# EAGLE board BareBonesArduino (EAGLE 7.5.0)
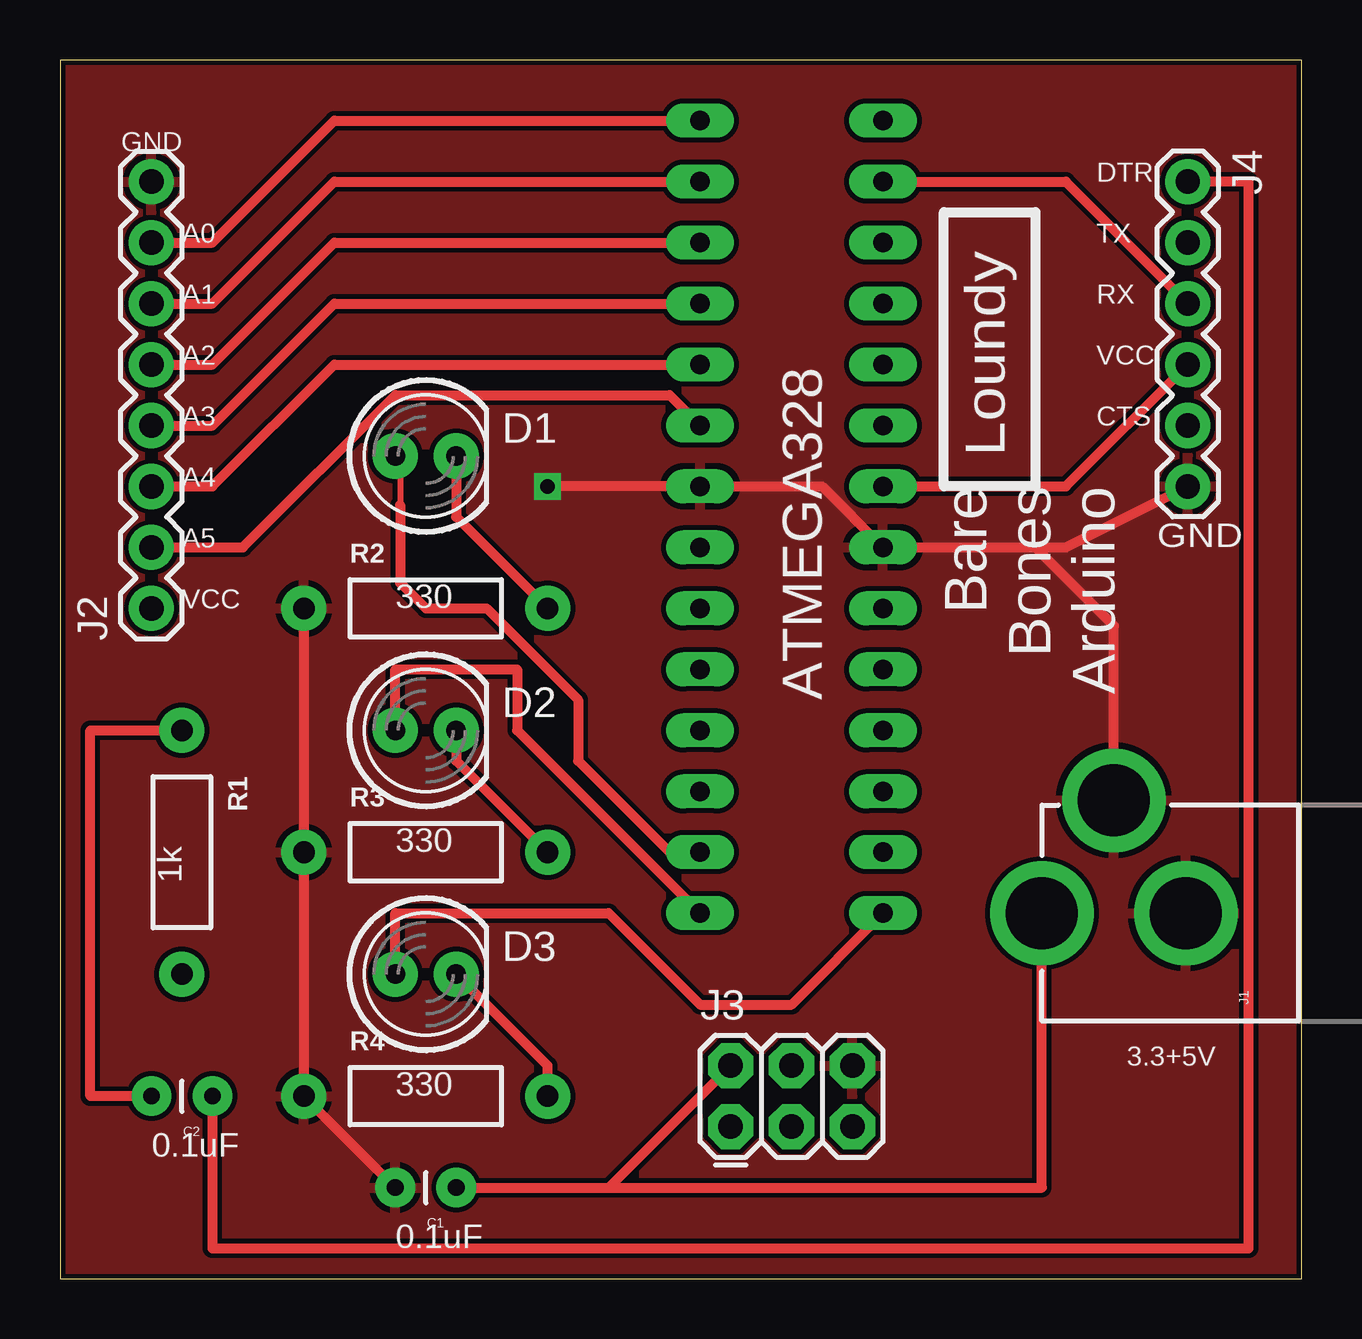
[diagram p0: board, top side]
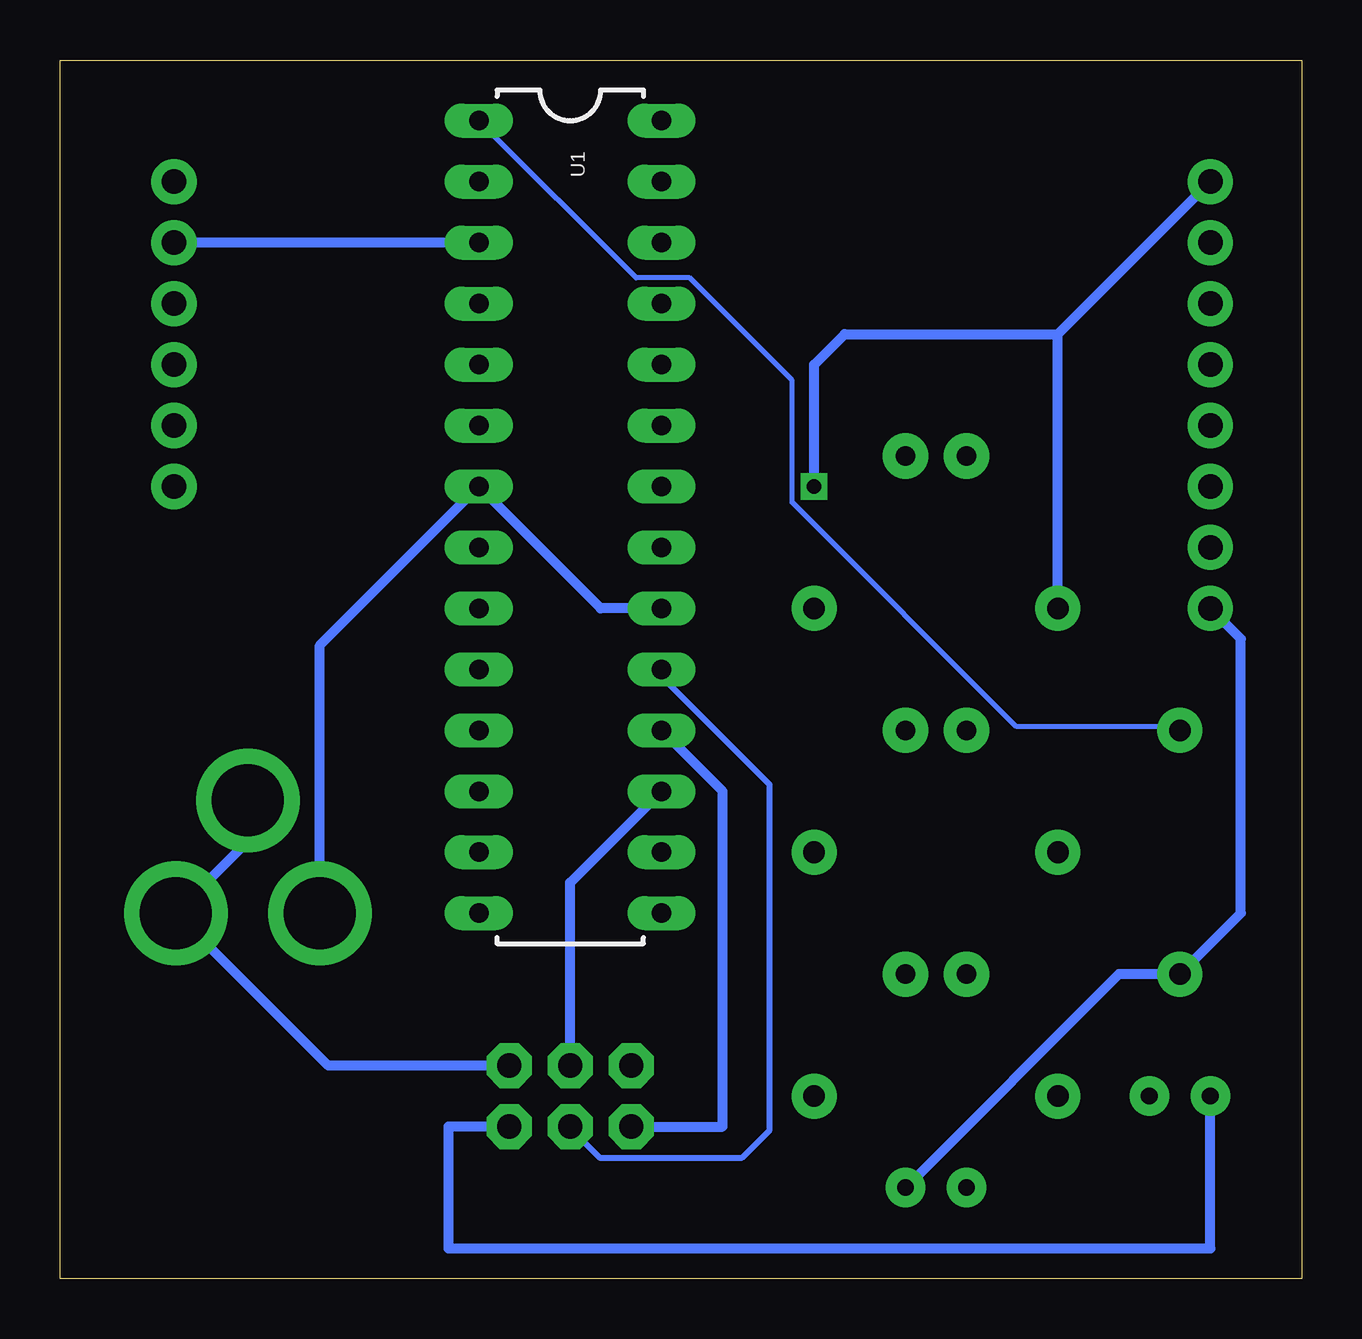
[diagram p1: board, bottom side, seen from below]

Size 51.74 x 50.79 mm. Coordinates in mm from the lower left corner, seen from the top.
Outline: 0,0 51.74,0 51.74,50.79 0,50.79 0,0
Copper layers (1*16): Top 0.035mm / dielectric 1.5mm / Bottom 0.035mm
Design rules "SparkFun": minimum track width 8mil, minimum drill 20mil, track to track 8mil, track to pad 8mil, pad to pad 8mil, via to via 8mil, smd to smd 8mil, copper to edge 8mil, drill to drill 8mil, minimum pad ring 12mil, minimum via ring 10mil, stop-mask expansion 4mil, vias tented up to drill 20mil, thermal gap 10mil

## Footprints (pad centres in the part's own frame; a part is rotated, then mirrored left to right if it is on the bottom)
CAP-PTH-SMALL = drill 0.7 pad 1.651: 1 0,0; 2 2.54,0
LED5MM = drill 0.813 pad 1.88: A -1.27,0; K 1.27,0
POWER_JACK_PTH = drill 2.997 pad 4.318: GND 0,7.7; GNDBREAK 4.7,10.7; PWR 0,13.7
1X08_ROUND = drill 1.016 pad 1.88: 1 0,0; 2 2.54,0; 3 5.08,0; 4 7.62,0; 5 10.16,0; 6 12.7,0; 7 15.24,0; 8 17.78,0
2X3 = drill 1.016 pad 1.88 octagon: 1 0,0; 2 0,2.54; 3 2.54,0; 4 2.54,2.54; 5 5.08,0; 6 5.08,2.54
1X06 = drill 1.016 pad 1.88: 1 0,0; 2 2.54,0; 3 5.08,0; 4 7.62,0; 5 10.16,0; 6 12.7,0
AXIAL-0.4 = drill 0.9 pad 1.88: P$1 -5.08,0; P$2 5.08,0
DIL28-3 = drill 0.813 long: 1 -16.51,-3.81; 2 -13.97,-3.81; 3 -11.43,-3.81; 4 -8.89,-3.81; 5 -6.35,-3.81; 6 -3.81,-3.81; 7 -1.27,-3.81; 8 1.27,-3.81; 9 3.81,-3.81; 10 6.35,-3.81; 11 8.89,-3.81; 12 11.43,-3.81; 13 13.97,-3.81; 14 16.51,-3.81; 15 16.51,3.81; 16 13.97,3.81; 17 11.43,3.81; 18 8.89,3.81; 19 6.35,3.81; 20 3.81,3.81; 21 1.27,3.81; 22 -1.27,3.81; 23 -3.81,3.81; 24 -6.35,3.81; 25 -8.89,3.81; 26 -11.43,3.81; 27 -13.97,3.81; 28 -16.51,3.81

## Placement (x,y rotation side)
C1  [CAP-PTH-SMALL]  16.51,3.81 180 top
C2  [CAP-PTH-SMALL]  6.35,7.62 180 top
D1  [LED5MM]  15.24,34.29 0 top
D2  [LED5MM]  15.24,22.86 0 top
D3  [LED5MM]  15.24,12.7 0 top
FRAME1  FRAME-LETTER  [CREATIVE_COMMONS]  -124.46,20.32 0 top  (outside the outline)
J1  POWER_JACKPTH  [POWER_JACK_PTH]  54.61,15.24 90 top
J2  [1X08_ROUND]  3.81,27.94 90 top
J3  AVR_SPI_PRG_6PTH  [2X3]  27.94,6.35 0 top
J4  [1X06]  46.99,45.72 270 top
R1  [AXIAL-0.4]  5.08,17.78 270 top
R2  [AXIAL-0.4]  15.24,27.94 0 top
R3  [AXIAL-0.4]  15.24,17.78 0 top
R4  [AXIAL-0.4]  15.24,7.62 0 top
U1  ATMEGA328P_PDIP  [DIL28-3]  30.48,31.75 270 bottom

## Library data of the parts
C1 C2 = SparkFun-Capacitors
D1-D3 = SparkFun-LED
FRAME1 = SparkFun-Aesthetics
J1 = SparkFun-Connectors; PROD_ID: CONN-08197
J2 = SparkFun-Connectors; PROD_ID: CONN-08437
J3 J4 = SparkFun-Connectors
R1-R4 = SparkFun-Resistors
U1 = SparkFun-DigitalIC

## Nets
CTS: J4.5
DTR: C2.1 J4.1
GND: C1.2 J1.GND J1.GNDBREAK J2.8 J3.6 J4.6 R2.P$1 R3.P$1 R4.P$1 U1.8 U1.22
MISO: J3.1 U1.18
MOSI: J3.4 U1.17
N$2: J2.2 U1.23
N$3: J2.3 U1.24
N$4: J2.4 U1.25
N$5: J2.5 U1.26
N$6: J2.6 U1.27
N$7: J2.7 U1.28
N$8: D1.A U1.16
N$9: D2.A U1.15
N$10: D3.A U1.14
N$11: D1.K R2.P$2
N$12: D2.K R3.P$2
N$13: D3.K R4.P$2
RESET: C2.2 J3.5 R1.P$1 U1.1
RX: J4.3 U1.2
SCK: J3.3 U1.19
TX: J4.2 U1.3
VCC: C1.1 J1.PWR J2.1 J3.2 J4.4 R1.P$2 U1.7 U1.20

## Tracks (layer width: path | path; a pad name or v marks a point on that pad's centre or on a via)
DTR
  Top 0.406: C2.1 6.35,1.27 49.53,1.27 49.53,45.72 J4.1
GND  (via drill 0.6)
  Top 0.406: C1.2 R4.P$1 R3.P$1 R2.P$1 | 40.64,30.48 U1.8 31.75,33.02 U1.22 v20.32,33.02 | 40.64,30.48 41.91,30.48 J4.6 | 40.64,30.48 43.91,27.21 J1.GNDBREAK
  Bottom 0.406: R2.P$1 10.16,39.37 | 10.16,39.37 J2.8 | J3.6 40.56,8.89 J1.GND 43.91,18.24 J1.GNDBREAK | v20.32,33.02 20.32,38.1 19.05,39.37 10.16,39.37
  pour Top: 0,0 0,50.8 52.07,50.8 52.07,0
MISO
  Bottom 0.406: J3.1 24.13,6.35 24.13,20.32 U1.18
MOSI
  Bottom 0.406: J3.4 30.48,16.51 U1.17
N$2
  Top 0.406: J2.2 7.62,30.48 13.97,36.83 25.4,36.83 U1.23
N$3
  Top 0.406: J2.3 6.35,33.02 11.43,38.1 U1.24
N$4
  Top 0.406: J2.4 6.35,35.56 11.43,40.64 U1.25
N$5
  Top 0.406: J2.5 6.35,38.1 11.43,43.18 U1.26
N$6
  Top 0.406: J2.6 6.35,40.64 11.43,45.72 U1.27
N$7
  Top 0.406: J2.7 6.35,43.18 11.43,48.26 U1.28
N$8
  Top 0.254: 26.52,18.31 26.52,17.86 U1.16 | 14.17,32.26 14.17,34.09 D1.A
  Top 0.406: 14.17,32.26 14.17,29.01 15.24,27.94 17.78,27.94 21.59,24.13 21.59,21.59 25.4,17.78 U1.16
N$9
  Top 0.406: D2.A 13.97,25.4 19.05,25.4 19.05,22.86 U1.15
N$10
  Top 0.406: D3.A 13.97,15.24 22.86,15.24 26.67,11.43 30.48,11.43 U1.14
N$11
  Top 0.406: D1.K 16.51,31.75 R2.P$2
N$12
  Top 0.406: D2.K 16.51,21.59 R3.P$2
N$13
  Top 0.406: R4.P$2 20.32,8.89 D3.K
RESET
  Top 0.406: C2.2 1.27,7.62 1.27,22.86 R1.P$1
  Bottom 0.203: U1.1 27.74,41.71 25.5,41.71 21.23,37.44 21.23,32.36 11.89,23.01 5.18,23.01 R1.P$1
  Bottom 0.406: J3.5 35.56,6.35 35.56,1.27 3.81,1.27 C2.2
RX
  Top 0.406: U1.2 41.91,45.72 J4.3
SCK
  Bottom 0.254: U1.19 26.52,25.4 26.52,24.94 22.17,20.6 22.17,6.2 23.32,5.05 29.26,5.05 30.4,6.2 J3.3
TX
  Bottom 0.406: U1.3 J4.2
VCC
  Top 0.406: U1.7 41.91,33.02 J4.4 | C1.1 22.86,3.81 | 22.86,3.81 40.91,3.81 J1.PWR | J3.2 22.86,3.81
  Bottom 0.406: U1.20 29.21,27.94 U1.7 40.91,26.4 J1.PWR | C1.1 7.62,12.7 R1.P$2 2.54,15.24 2.54,26.67 J2.1

## Text on the board
tPlace: GND | DTR | A0 | TX | A1 | RX | A2 | VCC | A3 | CTS | Loundy | A4 | Bare / Bones / Arduino | A5 | GND | VCC | 330 | ATMEGA328 | 330 | 1k | 3.3+5V | 330 | 0.1uF | 0.1uF